# Altium PCB Pre_Amplifier.PcbDoc
Units mm, origin at the board's own origin, x right, y up, seen from the top; angles counter-clockwise.
Board outline 100.71 x 100.2 mm, 4 copper layers (Top Layer, Layer 1, Layer 2, Bottom Layer), stack 1.5 mm thick; 75 components, 57 nets, 183 pads, 4 vias.
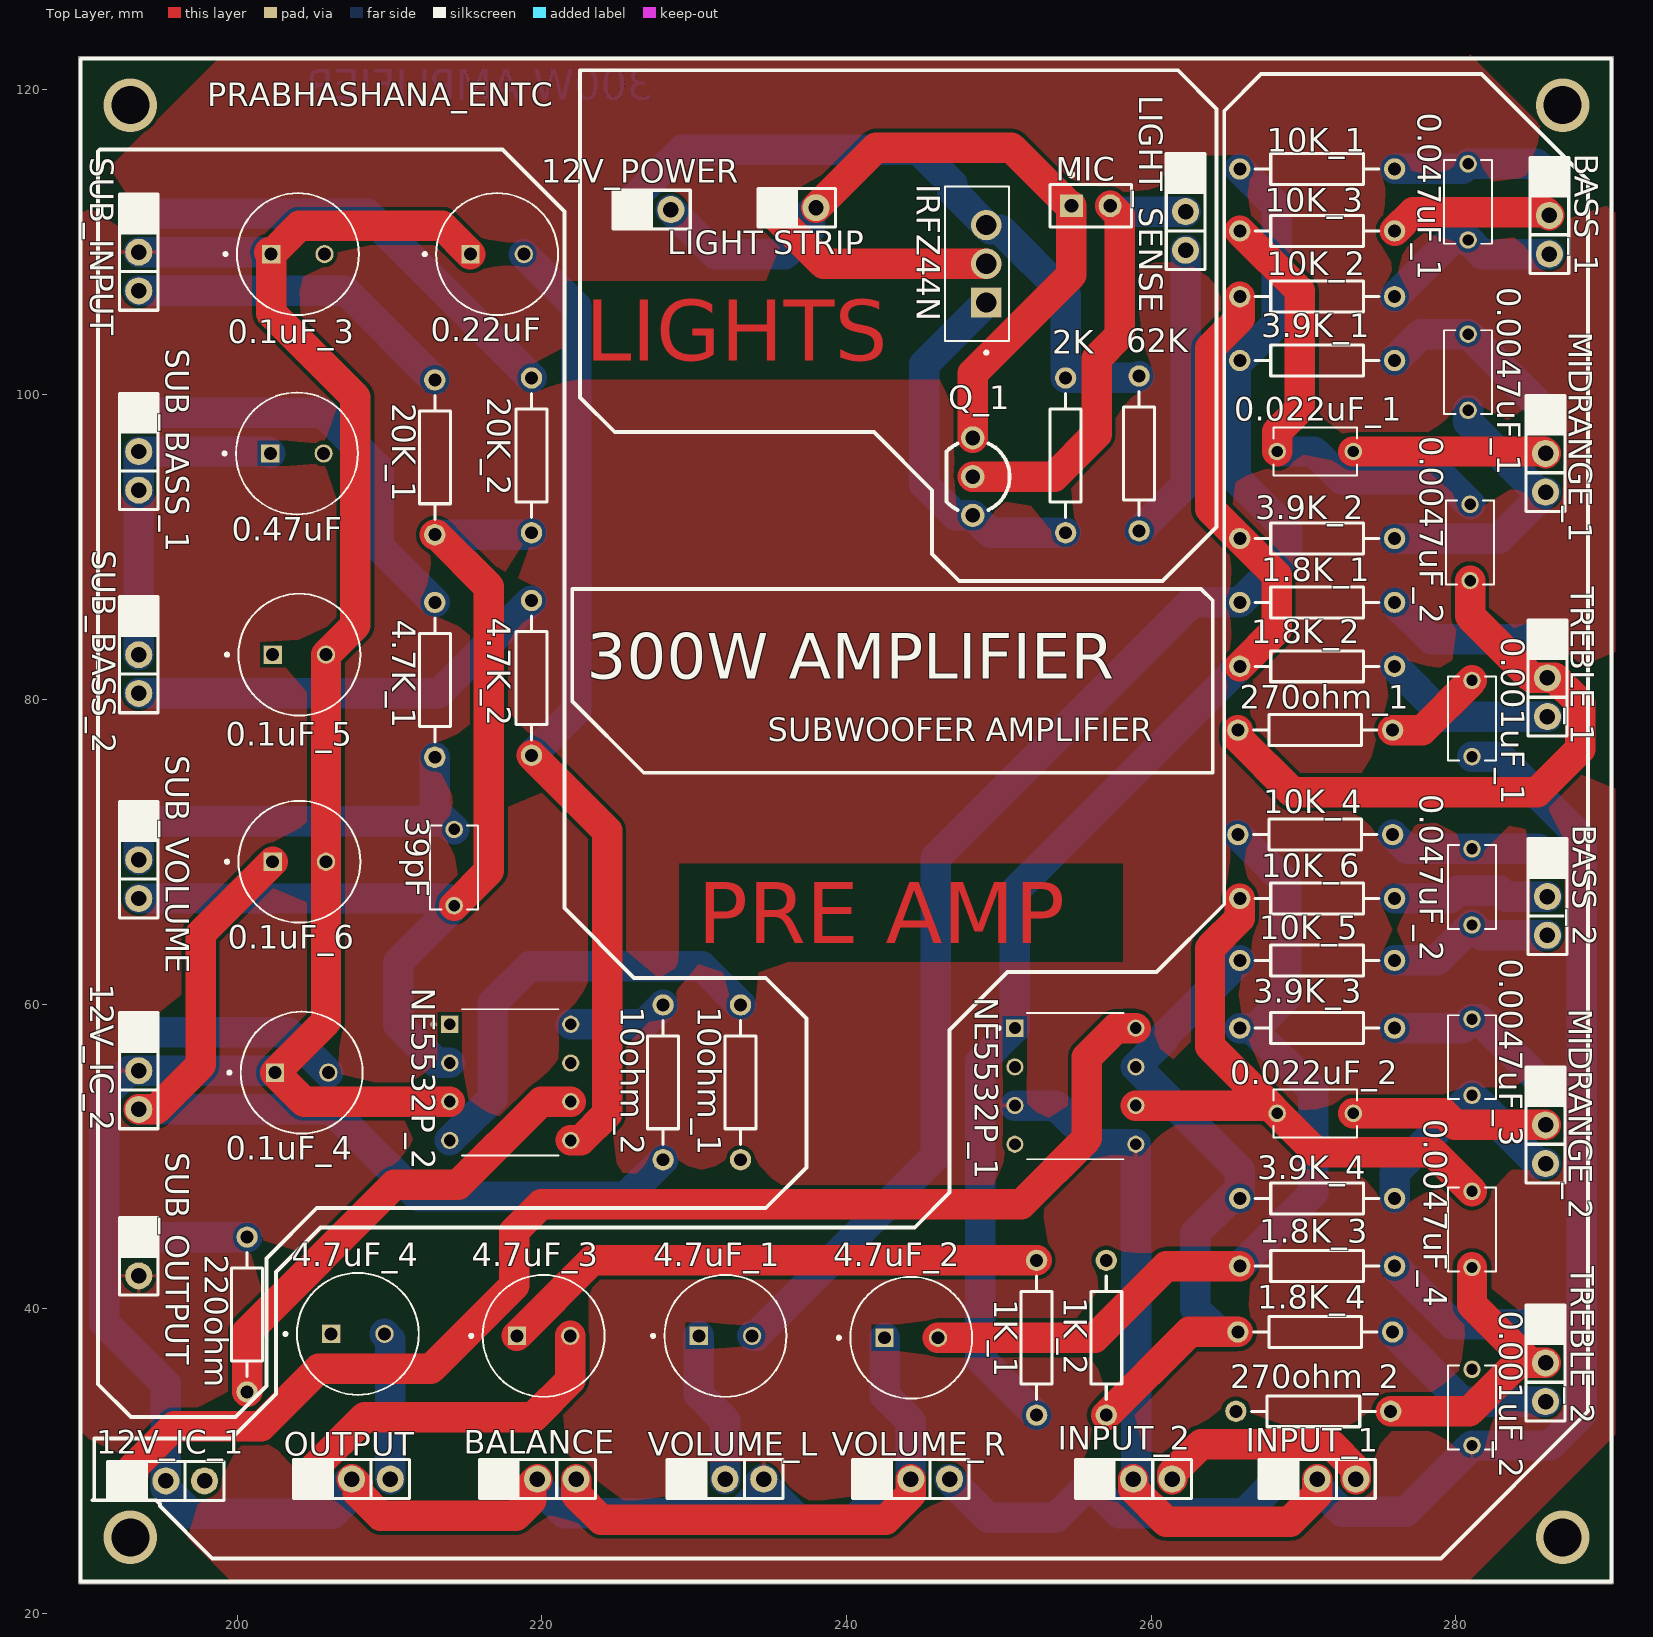
[diagram p0: Top Layer view]
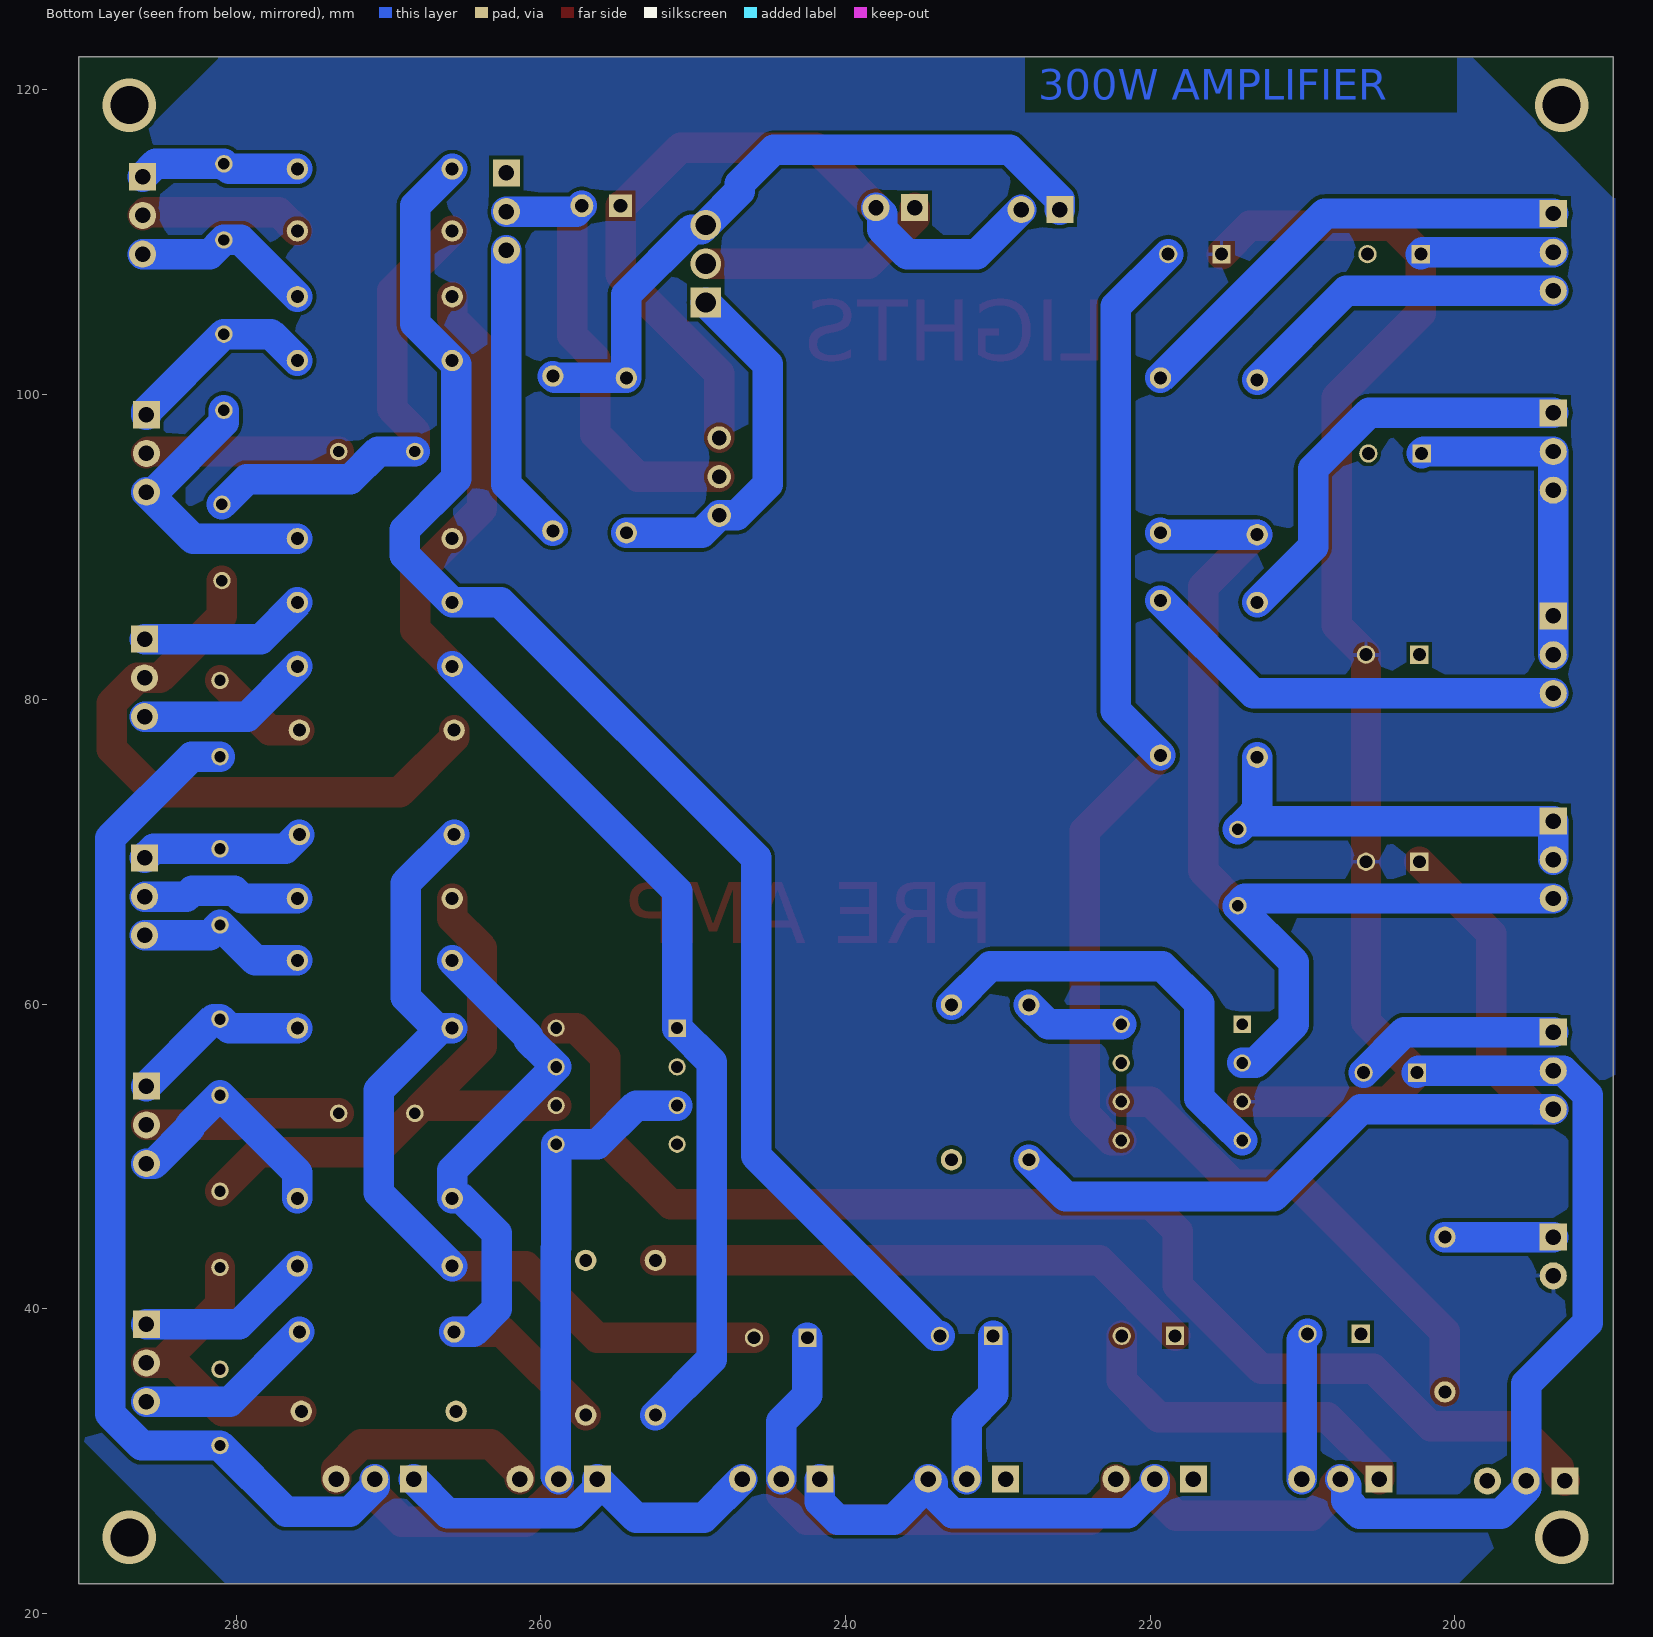
[diagram p1: Bottom Layer view, seen from below]
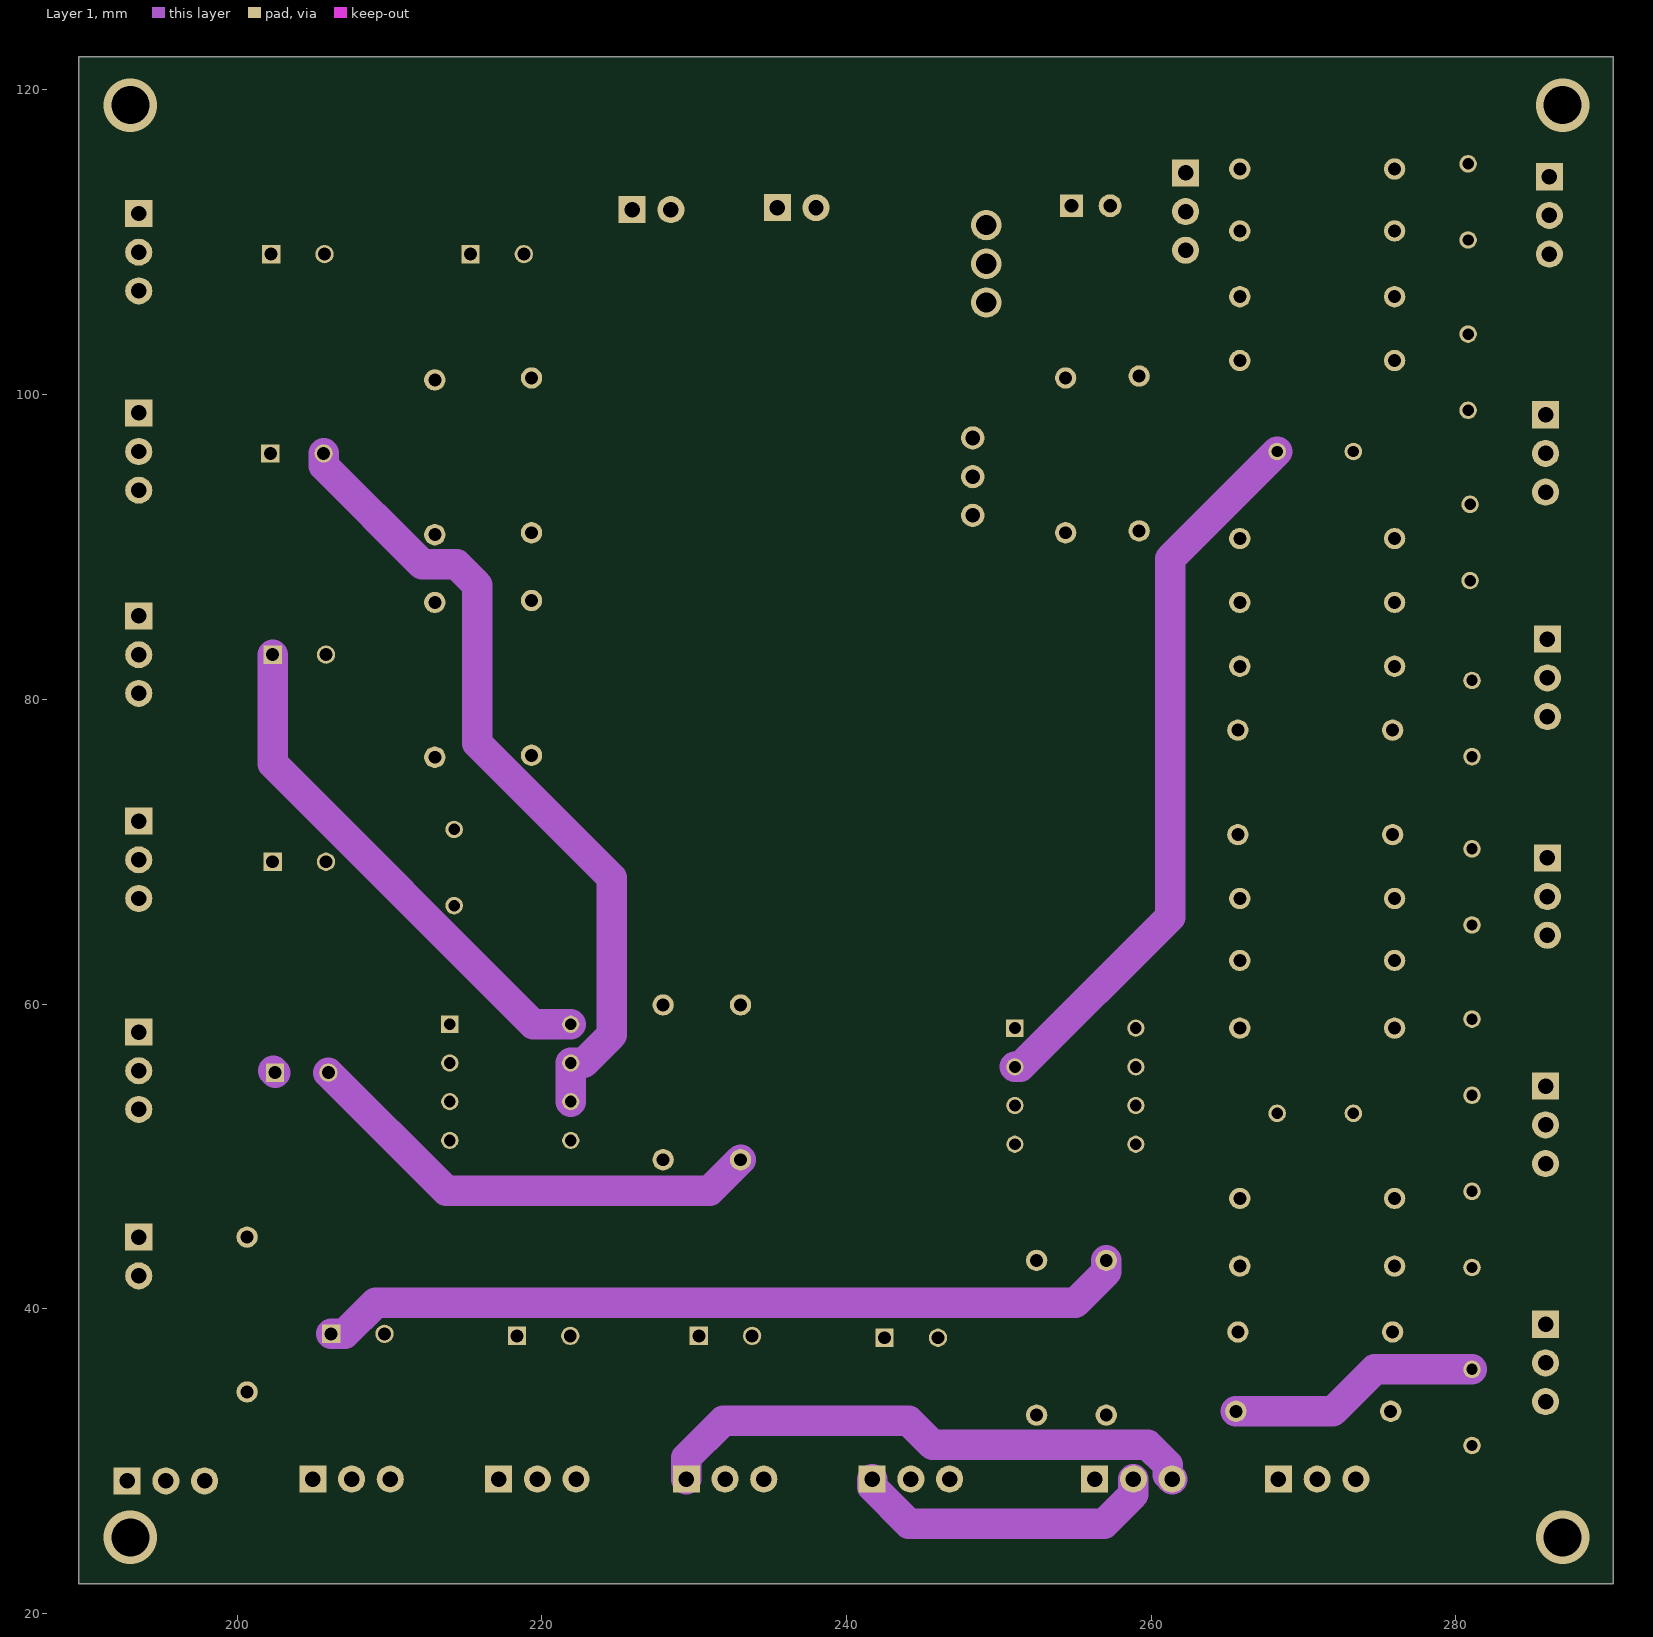
[diagram p2: Layer 1]
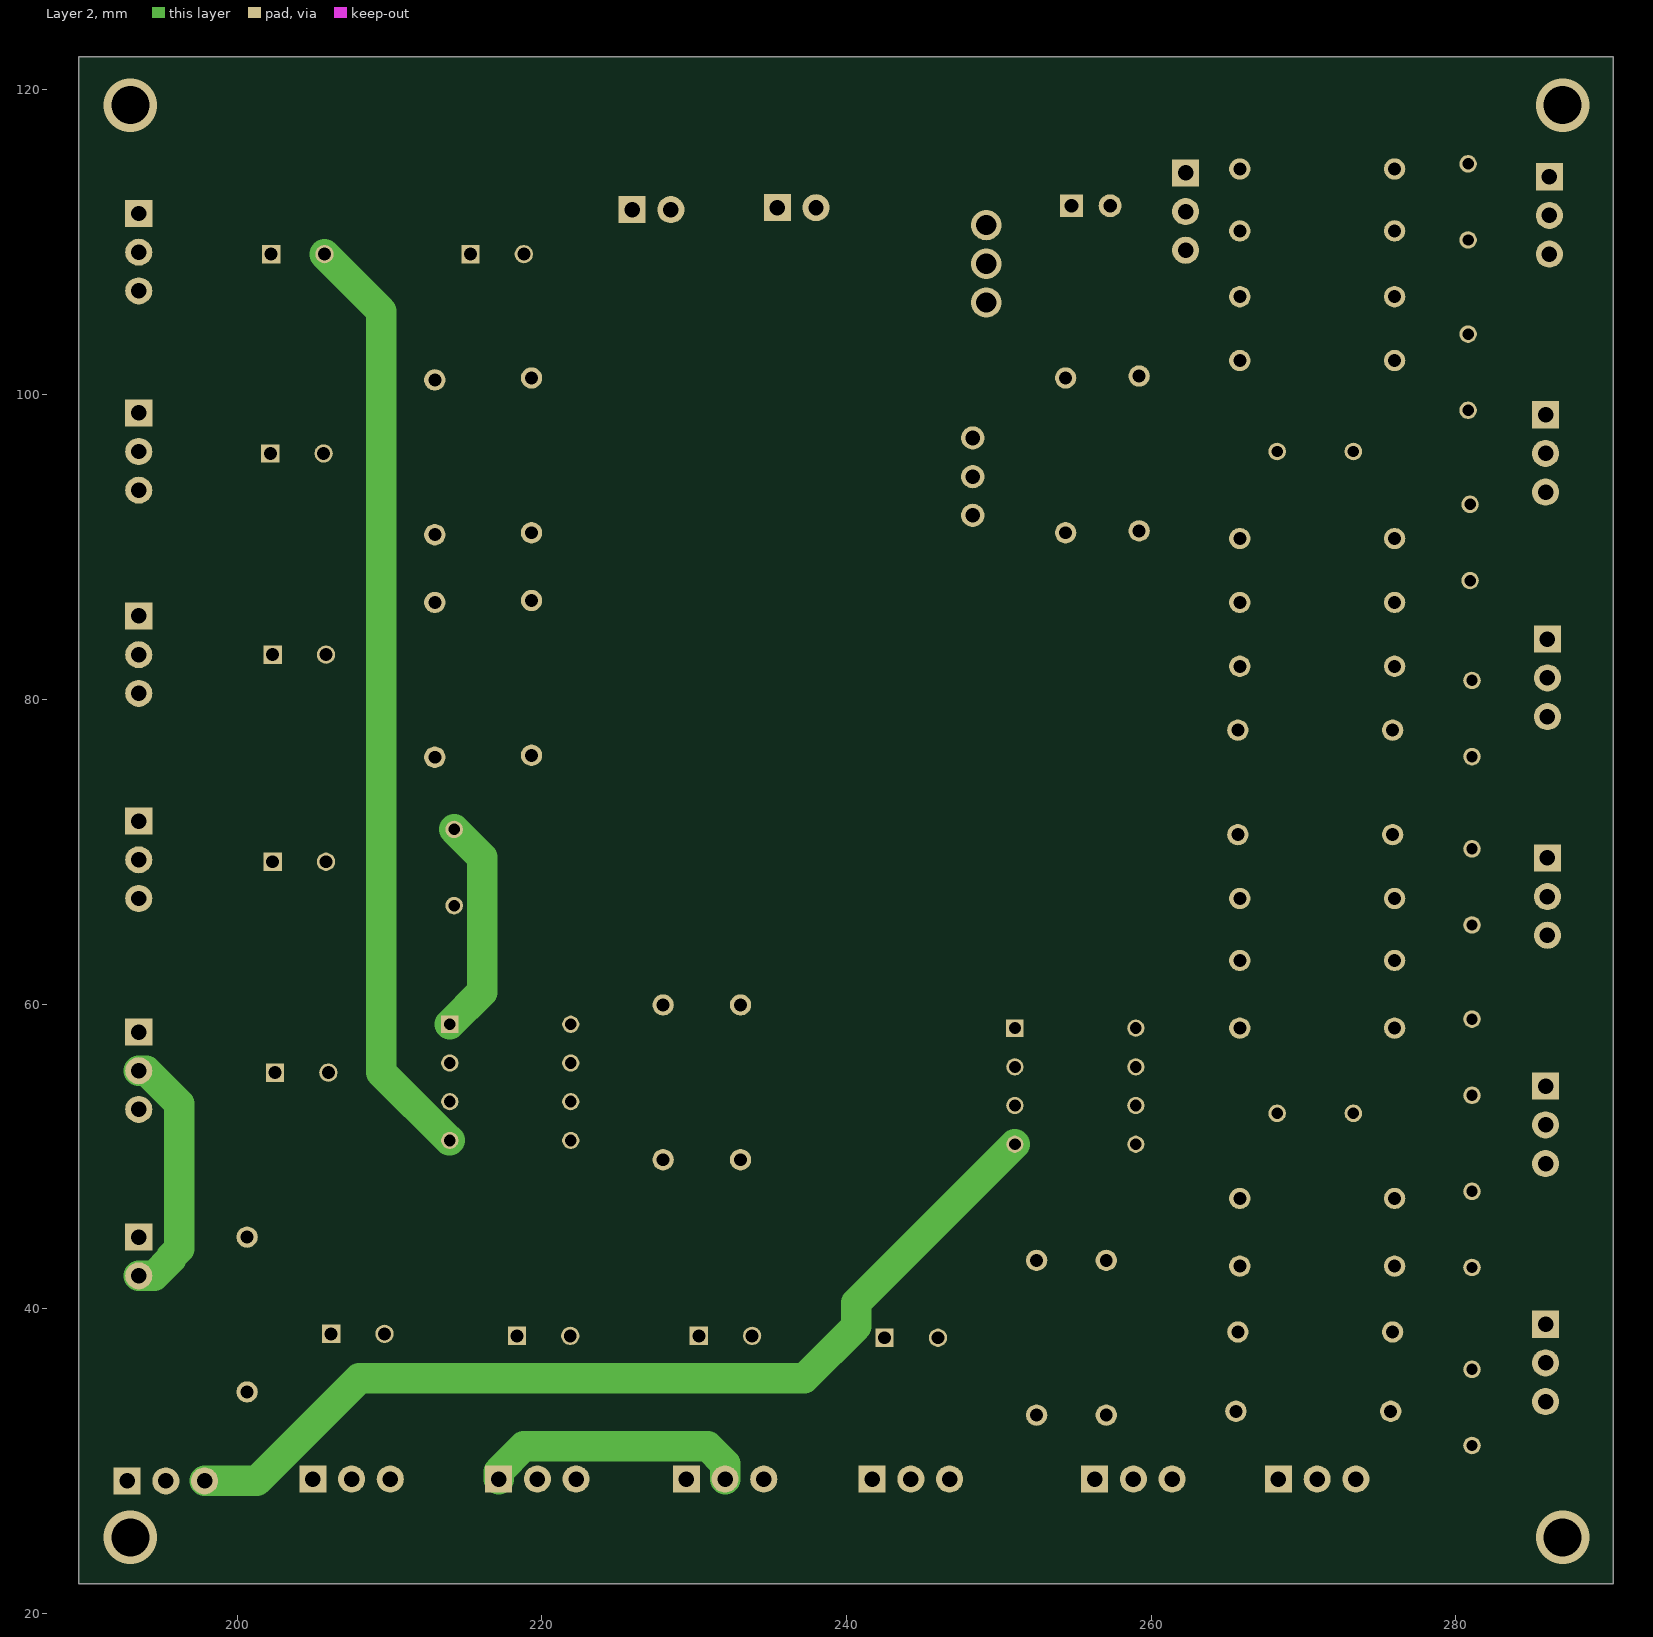
[diagram p3: Layer 2]

## Layer stack, top to bottom
Top Solder: solder mask 0.05, Solder Resist, Dk 3.5
Top Layer: signal copper 0.1
Dielectric 2: prepreg 0.2, PP-006, Dk 4.1
Layer 1: signal copper 0.2
Dielectric 1: dielectric 0.5, FR-4, Dk 4.8
Layer 2: signal copper 0.2
Dielectric 3: prepreg 0.2, PP-006, Dk 4.1
Bottom Layer: signal copper 0.1
Bottom Solder: solder mask 0.05, Solder Resist, Dk 3.5

## Board outline
189.611,21.971 290.322,21.971 290.322,122.174 189.611,122.174

## Design rules (kind name [scope] priority, off if disabled: settings)
Clearance [All] p1: gap=0.254 ignorepadtopadclearanceinfootprint=FALSE except(0: Arc-Hole Track-Hole SMDPad-Hole THPad-Hole Via-Hole Fill-Hole Poly-Hole Region-Hole Text-Hole)
MinimumSolderMaskSliver [All] p1: minsoldermaskwidth=0
PolygonConnect [All] p1: connectstyle=Relief reliefconductorwidth=0.254 reliefentries=4 polygonreliefangle="90 Angle" airgapwidth=0.254
RoutingVias [All] p1: holewidth=1 width=1.5 viastyle="Through Hole" minholewidth=0.5 minwidth=0.75 maxholewidth=2 maxwidth=2.5
SilkToSilkClearance [All] p1: silktosilkclearance=0
SilkToSolderMaskClearance [IsPad] p1: minsilkscreentomaskgap=0 clearancetoexposedcopper=TRUE
SolderMaskExpansion [All] p1: expansion=0.102 istentingtop=FALSE
Width [All] p1: maxlimit=2 minlimit=2 preferedwidth=2
27 further rules are at their usual default settings.

## Components (designator, comment, footprint, x,y, rotation, side; value= is the part's Value field where it differs from the comment)
0.001uF_1 "RDE5C1H273J2M1H03A" CAP_RDE5C1H273J2M1H03A 281.051,78.74 r90 top
0.001uF_2 "RDE5C1H273J2M1H03A" CAP_RDE5C1H273J2M1H03A 281.051,33.528 r90 top
0.1uF_3 "ECA1HM101" CAPPRD350W60D800H1150 203.99,109.22 r0 top
0.1uF_4 "ECA1HM101" CAPPRD350W60D800H1150 204.244,55.499 r0 top
0.1uF_5 "ECA1HM101" CAPPRD350W60D800H1150 204.089,82.931 r0 top
0.1uF_6 "ECA1HM101" CAPPRD350W60D800H1150 204.089,69.342 r0 top
0.22uF "ECA1HM101" CAPPRD350W60D800H1150 217.071,109.22 r0 top
0.022uF_1 "RDE5C1H273J2M1H03A" CAP_RDE5C1H273J2M1H03A 270.764,96.266 r180 top
0.022uF_2 "RDE5C1H273J2M1H03A" CAP_RDE5C1H273J2M1H03A 270.764,52.832 r180 top
0.47uF "ECA1HM101" CAPPRD350W60D800H1150 203.934,96.139 r0 top
0.0047uF_1 "RDE5C1H273J2M1H03A" CAP_RDE5C1H273J2M1H03A 280.797,101.473 r270 top
0.047uF_1 "RDE5C1H273J2M1H03A" CAP_RDE5C1H273J2M1H03A 280.797,112.649 r270 top
0.047uF_2 "RDE5C1H273J2M1H03A" CAP_RDE5C1H273J2M1H03A 281.051,67.691 r270 top
0.0047uF_2 "RDE5C1H273J2M1H03A" CAP_RDE5C1H273J2M1H03A 280.924,90.297 r90 top
0.0047uF_3 "RDE5C1H273J2M1H03A" CAP_RDE5C1H273J2M1H03A 281.051,56.515 r270 top
0.0047uF_4 "RDE5C1H273J2M1H03A" CAP_RDE5C1H273J2M1H03A 281.051,45.212 r90 top
1.8K_1 "Res2" AXIAL-0.4 270.891,86.36 r0 top value=1.8K
1.8K_2 "Res2" AXIAL-0.4 270.891,82.169 r180 top value=1.8K
1.8K_3 "Res2" AXIAL-0.4 270.891,42.799 r0 top value=1.8K
1.8K_4 "Res2" AXIAL-0.4 270.764,38.481 r180 top value=1.8K
1K_1 "Res2" AXIAL-0.4 252.476,38.1 r90 top value=1K
1K_2 "Res2" AXIAL-0.4 257.048,38.1 r90 top value=1K
2K "Res2" AXIAL-0.4 254.381,96.012 r90 top value=2K
3.9K_1 "Res2" AXIAL-0.4 270.891,102.235 r0 top value=3.9K
3.9K_2 "Res2" AXIAL-0.4 270.891,90.551 r180 top value=3.9K
3.9K_3 "Res2" AXIAL-0.4 270.891,58.42 r0 top value=3.9K
3.9K_4 "Res2" AXIAL-0.4 270.891,47.244 r180 top value=3.9K
4.7K_1 "Res2" AXIAL-0.4 212.979,81.28 r90 top value=4.7K
4.7K_2 "Res2" AXIAL-0.4 219.329,81.407 r90 top value=4.7K
4.7uF_1 "ECA1HM101" CAPPRD350W60D800H1150 232.057,38.227 r0 top
4.7uF_2 "ECA1HM101" CAPPRD350W60D800H1150 244.249,38.1 r0 top
4.7uF_3 "ECA1HM101" CAPPRD350W60D800H1150 220.119,38.227 r0 top
4.7uF_4 "ECA1HM101" CAPPRD350W60D800H1150 207.927,38.354 r0 top
10K_1 "Res2" AXIAL-0.4 270.891,114.808 r0 top value=10K
10K_2 "Res2" AXIAL-0.4 270.891,106.426 r180 top value=10K
10K_3 "Res2" AXIAL-0.4 270.891,110.744 r180 top value=10K
10K_4 "Res2" AXIAL-0.4 270.764,71.12 r0 top value=10K
10K_5 "Res2" AXIAL-0.4 270.891,62.865 r180 top value=10K
10K_6 "Res2" AXIAL-0.4 270.891,66.929 r180 top value=10K
10ohm_1 "Res2" AXIAL-0.4 233.045,54.864 r90 top value=10ohm
10ohm_2 "Res2" AXIAL-0.4 227.965,54.864 r90 top value=10ohm
12V_IC_1 "HEADER-1X3" HEADER-1X3 192.786,28.702 r90 top
12V_IC_2 "HEADER-1X3" HEADER-1X3 193.548,58.166 r0 top
12V_POWER "HEADER-1X2" HEADER-1X2 225.933,112.141 r90 top
20K_1 "Res2" AXIAL-0.4 212.979,95.885 r270 top value=20K
20K_2 "Res2" AXIAL-0.4 219.329,96.012 r270 top value=20K
39pF "RDE5C1H273J2M1H03A" CAP_RDE5C1H273J2M1H03A 214.249,68.961 r90 top
62K "Res2" AXIAL-0.4 259.207,96.139 r90 top value=62K
220ohm "Res2" AXIAL-0.4 200.66,39.624 r90 top value=220ohm
270ohm_1 "Res2" AXIAL-0.4 270.764,77.978 r180 top value=270ohm
270ohm_2 "Res2" AXIAL-0.4 270.637,33.274 r0 top value=270ohm
BALANCE "HEADER-1X3" HEADER-1X3 217.17,28.829 r90 top
BASS_1 "HEADER-1X3" HEADER-1X3 286.131,114.3 r0 top
BASS_2 "HEADER-1X3" HEADER-1X3 286.004,69.596 r0 top
INPUT_1 "HEADER-1X3" HEADER-1X3 268.351,28.829 r90 top
INPUT_2 "HEADER-1X3" HEADER-1X3 256.286,28.829 r90 top
IRFZ44N "IRFZ44NPBF" TO254P1016X419X2286-3 249.174,108.585 r90 top
"LIGHT STRIP" "HEADER-1X2" HEADER-1X2 235.458,112.268 r90 top
LIGHT_SENSE "HEADER-1X3" HEADER-1X3 262.255,114.554 r0 top
MIC "Mic2" PIN2 254.762,112.395 r0 top
MIDRANGE_1 "HEADER-1X3" HEADER-1X3 285.877,98.679 r0 top
MIDRANGE_2 "HEADER-1X3" HEADER-1X3 285.877,54.61 r0 top
NE5532P_1 "NE5532P" DIP794W45P254L959H508Q8 255.016,54.61 r0 top
NE5532P_2 "NE5532P" DIP794W45P254L959H508Q8 217.932,54.864 r0 top
OUTPUT "HEADER-1X3" HEADER-1X3 204.978,28.829 r90 top
Q_1 "BC557" TO-92 248.285,94.615 r0 top value={Value}
SUB_BASS_1 "HEADER-1X3" HEADER-1X3 193.548,98.806 r0 top
SUB_BASS_2 "HEADER-1X3" HEADER-1X3 193.548,85.471 r0 top
SUB_INPUT "HEADER-1X3" HEADER-1X3 193.548,111.887 r0 top
SUB_OUTPUT "HEADER-1X2" HEADER-1X2 193.548,44.704 r0 top
SUB_VOLUME "HEADER-1X3" HEADER-1X3 193.548,72.009 r0 top
TREBLE_1 "HEADER-1X3" HEADER-1X3 286.004,83.947 r0 top
TREBLE_2 "HEADER-1X3" HEADER-1X3 285.877,38.989 r0 top
VOLUME_L "HEADER-1X3" HEADER-1X3 229.489,28.829 r90 top
VOLUME_R "HEADER-1X3" HEADER-1X3 241.681,28.829 r90 top

## Footprints (in the part's own frame and the unit in brackets; to place one, negate y for a bottom-side part, rotate by r counter-clockwise, add the part's x,y. Pads: shape width x height; smd on the part's side, far side on the other; paste and mask are expansions set on the pad)
AXIAL-0.4 [mm] "Axial Device, Thru-Hole; 2 Leads; 0.4 in Pin Spacing"
  round 1.4 hole 0.85: 1(-5.08,0) 2(5.08,0)
  silkscreen extent -4.06,-1.02 4.06,1.02
CAP_RDE5C1H273J2M1H03A [mm]
  round 1.15 hole 0.75: 1(-2.5,0) 2(2.5,0)
  silkscreen extent -2.75,-1.58 2.75,1.58
CAPPRD350W60D800H1150 [mm]
  round 1.2 hole 0.85: N(1.75,0)
  rect 1.2x1.2 hole 0.85: P(-1.75,0)
  silkscreen extent -4.85,-4 4,4, body extent -4,-4 4,4, height 11.5
DIP794W45P254L959H508Q8 [mm]
  rect 1.13x1.13 hole 0.78: 1(-3.97,3.81)
  round 1.13 hole 0.78: 2(-3.97,1.27) 3(-3.97,-1.27) 4(-3.97,-3.81) 5(3.97,-3.81) 6(3.97,-1.27) 7(3.97,1.27) 8(3.97,3.81)
  silkscreen extent -5.13,-4.79 3.17,4.79
HEADER-1X2 [mil]
  rect 70x70 hole 40: 1(0,0)
  round 70 hole 40: 2(0,-100)
  silkscreen extent -50,-150 50,50, body extent -50,-150 50,50, height 470
HEADER-1X3 [mil]
  rect 70x70 hole 40: 1(0,0)
  round 70 hole 40: 2(0,-100) 3(0,-200)
  silkscreen extent -50,-250 50,50, body extent -50,-250 50,50, height 470
PIN2 [mm] "Photosensitive Diode; 2 Leads"
  rect 1.5x1.5 hole 0.9: 1(0,0)
  round 1.5 hole 0.9: 2(2.54,0)
  silkscreen extent -1.4,-1.4 3.94,2.17
TO254P1016X419X2286-3 [mm]
  rect 1.995x1.995 / inner round 1.995 / far side rect 1.995x1.995 hole 1.33: 1(-2.54,0)
  round 1.995 hole 1.33: 2(0,0) 3(2.54,0)
  silkscreen extent -5.93,-1.48 5.08,2.72, body extent -5.08,-1.47 5.08,2.72, height 22.86
TO-92 [mil]
  round 60 hole 38: 1(0,100) 2(0,0) 3(0,-100)
  silkscreen extent -68,-86 95,86, body extent -63,-110 93,110, height 217

## Part data
0.001uF_1 0.001uF_2 0.022uF_1 0.022uF_2 0.0047uF_1 0.047uF_1 0.047uF_2 0.0047uF_2 0.0047uF_3 0.0047uF_4 39pF: "Lead Capacitor C0G_EIA_ with Capacitance: 27000pF and Rated Voltage: 50Vdc", Package=NONSTANDARD, Availability=Unavailable, MF=Murata, MP=RDE5C1H273J2M1H03A, Price=None, SnapEDA_Link=https://www.snapeda.com/parts/RDE5C1H273J2M1H03A/Murata/view-part/4544923/?ref=snap
0.1uF_3 0.1uF_4 0.1uF_5 0.1uF_6 0.22uF 0.47uF 4.7uF_1 4.7uF_2 4.7uF_3 4.7uF_4: "100ÂµF 50V Aluminum Electrolytic Capacitors Radial, Can 2000 Hrs @ 85Â°C", Package="RADIAL-2 Panasonic", Availability="No availability data", Check_prices=https://www.snapeda.com/parts/ECA1HM101/Panasonic/view-part/4478734/?ref=eda, MF=Panasonic, MP=ECA1HM101, Price=None, SnapEDA_Link=https://www.snapeda.com/parts/ECA1HM101/Panasonic/view-part/4478734/?ref=snap
1.8K_1 1.8K_2 1.8K_3 1.8K_4 1K_1 1K_2 2K 3.9K_1 3.9K_2 3.9K_3 3.9K_4 4.7K_1 4.7K_2 10K_1 10K_2 10K_3 10K_4 10K_5 10K_6 10ohm_1 10ohm_2 20K_1 20K_2 62K 220ohm 270ohm_1 270ohm_2: "Resistor", LatestRevisionDate=17-Jul-2002, LatestRevisionNote="Re-released for DXP Platform.", PackageDescription="Axial Device, Thru-Hole; 2 Leads; 0.4 in Pin Spacing", PackageReference=AXIAL-0.4, Published=8-Jun-2000, Publisher="Altium Limited"
12V_IC_1 12V_IC_2 12V_POWER BALANCE BASS_1 BASS_2 INPUT_1 INPUT_2 "LIGHT STRIP" LIGHT_SENSE MIDRANGE_1 MIDRANGE_2 OUTPUT SUB_BASS_1 SUB_BASS_2 SUB_INPUT SUB_OUTPUT SUB_VOLUME TREBLE_1 TREBLE_2 VOLUME_L VOLUME_R: Supplier Part Number 1=S1011E-36-ND, Supplier 1=Digi-Key
  12V_POWER "LIGHT STRIP" SUB_OUTPUT: REEL=TH
IRFZ44N: "N-Channel 55 V 49A (Tc) 94W (Tc) Through Hole TO-220AB", Package="TO-220-3 Infineon", Check_prices=https://www.snapeda.com/parts/IRFZ44NPBF/Infineon+Technologies/view-part/?ref=eda, Digi-Key_Part_Number=IRFZ44NPBF-ND, MF=Infineon, MP=IRFZ44NPBF, Purchase-URL=https://pricing.snapeda.com/search/part/IRFZ44NPBF/?ref=eda, SnapEDA_Link=https://www.snapeda.com/parts/IRFZ44NPBF/Infineon+Technologies/view-part/?ref=snap
MIC: "Microphone", LatestRevisionDate=17-Jul-2002, LatestRevisionNote="Re-released for DXP Platform.", PackageReference=PIN2, Published=24-Mar-1999, Publisher="Altium Limited"
NE5532P_1 NE5532P_2: "Dual Low-Noise High-Speed Audio Operational Amplifier 8-PDIP 0 to 70", Package="PDIP-8 Texas", Availability=Good, Check_prices=https://www.snapeda.com/parts/NE5532P/Texas%20Instruments/view-part/9039/?ref=eda, MF="Texas Instruments", MP=NE5532P, Price=None, Purchase-URL=https://pricing.snapeda.com/search/part/NE5532P/?ref=eda, SnapEDA_Link=https://www.snapeda.com/parts/NE5532P/Texas%20Instruments/view-part/9039/?ref=snap

## Via types
v1: diameter 3.5, hole 2.5, Top Layer to Bottom Layer, 4 vias

## Nets (pads, with @x,y where several pads share a name; then routed paths per layer and width w, separated by ;. In a path a pad name is that pad's centre, name@x,y a point inside that pad or via, vN(x,y) a via of type N, cw(c..) or ccw(c..) an arc to the next point about the centre after c; other vN are vias at no path point)
GND: 0.001uF_1.1 0.001uF_2.1 0.1uF_3.P 0.1uF_4.P 0.1uF_5.N 0.1uF_6.N 0.22uF.P 12V_IC_1.2 12V_IC_2.2 BALANCE.2 INPUT_1.2 INPUT_2.2 NE5532P_1.3 NE5532P_1.5 NE5532P_2.3 OUTPUT.2 SUB_INPUT.2 SUB_OUTPUT.2 VOLUME_L.3 VOLUME_R.1 | length 342.7
  Top Layer w2: 0.1uF_3.P@202.113,109.347 0.1uF_3.P ; OUTPUT.2 207.915,28.432 207.915,27.941 209.44,26.416 218.308,26.416 219.313,27.421 219.313,28.432 BALANCE.2 ; NE5532P_2.3 204.399,53.594 0.1uF_4.P 205.839,58.844 0.1uF_6.N 0.1uF_5.N 207.772,84.864 207.772,99.822 202.24,105.354 0.1uF_3.P ; 0.22uF.P 213.467,111.074 204.094,111.074 0.1uF_3.P ; INPUT_2.2 258.826,28.181 260.972,26.035 269.113,26.035 270.891,27.813 INPUT_1.2
  Layer 1 w2: 0.1uF_4.P@202.367,55.626 0.1uF_4.P ; VOLUME_R.1 241.681,28.321 244.094,25.908 256.916,25.908 258.826,27.818 INPUT_2.2
  Layer 2 w2: SUB_OUTPUT.2 194.559,42.164 195.691,43.296 195.691,43.418 196.215,43.942 196.215,53.45 194.039,55.626 12V_IC_2.2
  Bottom Layer w2: SUB_INPUT.2 202.113,109.347 0.1uF_3.P ; 0.1uF_4.P 202.367,55.626 12V_IC_2.2 192.9,55.626 191.294,54.02 191.294,39.1 195.326,35.068 12V_IC_1.2 195.326,28.211 196.978,26.559 206.259,26.559 207.121,27.421 207.121,28.432 OUTPUT.2 ; BALANCE.2 219.71,28.338 221.473,26.575 232.963,26.575 234.283,27.895 234.283,28.543 VOLUME_L.3 234.569,28.448 236.855,26.162 240.509,26.162 241.681,27.334 VOLUME_R.1 ; NE5532P_1.3 253.746,53.34 256.286,50.8 NE5532P_1.5 258.986,44.005 259.002,43.989 259.002,29.005 INPUT_2.2 ; INPUT_1.2 270.891,28.338 272.543,26.686 276.709,26.686 0.001uF_2.1 286.184,31.028 288.258,33.102 288.258,70.893 282.911,76.24 0.001uF_1.1
Net0.001uF_1_2: 0.001uF_1.2 270ohm_1.1 | length 6.6
  Top Layer w2: 270ohm_1.1 277.789,77.978 0.001uF_1.2
Net0.001uF_2_2: 0.001uF_2.2 270ohm_2.1 | length 16.6
  Layer 1 w2: 270ohm_2.1 271.927,33.274 274.681,36.028 0.001uF_2.2
Net0.1uF_3_N: 0.1uF_3.N 10ohm_1.2 NE5532P_2.4 | length 90.1
  Layer 2 w2: 0.1uF_3.N 209.474,105.486 209.474,55.509 213.93,51.054 NE5532P_2.4
  Bottom Layer w2: NE5532P_2.4 214.683,51.775 214.715,51.775 216.768,53.828 216.768,60.05 219.202,62.484 230.505,62.484 10ohm_1.2
Net0.1uF_4_N: 0.1uF_4.N 10ohm_1.1 12V_IC_2.1 | length 44.7
  Layer 1 w2: 0.1uF_4.N 213.741,47.752 231.013,47.752 10ohm_1.1
  Bottom Layer w2: 12V_IC_2.1 203.327,58.166 0.1uF_4.N
Net0.1uF_5_P: 0.1uF_5.P 10ohm_2.2 NE5532P_2.8 | length 40.4
  Layer 1 w2: 0.1uF_5.P 202.339,75.784 219.449,58.674 NE5532P_2.8
  Bottom Layer w2: NE5532P_2.8 226.695,58.674 10ohm_2.2
Net0.1uF_6_P: 0.1uF_6.P 10ohm_2.1 12V_IC_2.3 | length 58.4
  Top Layer w2: 12V_IC_2.3 194.691,53.086 197.612,56.007 197.612,64.615 0.1uF_6.P
  Bottom Layer w2: 12V_IC_2.3 206.176,53.086 211.891,47.371 225.552,47.371 10ohm_2.1
Net0.022uF_1_1: 0.022uF_1.1 MIDRANGE_1.2 | length 12.7
  Top Layer w2: 0.022uF_1.1 285.75,96.266 MIDRANGE_1.2
Net0.022uF_1_2: 0.022uF_1.2 0.0047uF_2.2 10K_3.2 NE5532P_1.2 | length 78.6
  Top Layer w2: 10K_3.2 269.748,106.807 269.748,99.06 268.264,97.576 0.022uF_1.2
  Layer 1 w2: NE5532P_1.2 251.409,55.88 261.239,65.71 261.239,89.241 0.022uF_1.2
  Bottom Layer w2: 0.022uF_1.2 270.677,96.266 272.506,94.437 279.284,94.437 0.0047uF_2.2
Net0.022uF_2_1: 0.022uF_2.1 MIDRANGE_2.2 | length 12.9
  Top Layer w2: 0.022uF_2.1 279.19,52.832 279.952,52.07 MIDRANGE_2.2
Net0.022uF_2_2: 0.022uF_2.2 0.0047uF_4.2 10K_6.2 NE5532P_1.6 | length 40.4
  Top Layer w2: NE5532P_1.6 267.756,53.34 ; 10K_6.2 265.811,65.628 263.857,63.674 263.857,57.239 267.756,53.34 ; 0.0047uF_4.2 278.491,50.272 270.824,50.272 0.022uF_2.2 267.756,53.34
Net0.22uF_N: 0.22uF.N 4.7K_2.1 NE5532P_2.5 | length 64.2
  Top Layer w2: 4.7K_2.1 224.282,71.374 224.282,52.786 222.55,51.054 NE5532P_2.5
  Bottom Layer w2: 0.22uF.N 222.25,105.791 222.25,79.248 4.7K_2.1
Net0.0047uF_1_1: 0.0047uF_1.1 3.9K_1.2 MIDRANGE_1.1 | length 12.9
  Bottom Layer w2: 3.9K_1.2 277.709,103.973 0.0047uF_1.1 285.877,98.893 MIDRANGE_1.1
Net0.047uF_1_1: 0.047uF_1.1 10K_1.2 BASS_1.1 | length 10.7
  Bottom Layer w2: 10K_1.2 280.456,114.808 0.047uF_1.1 285.282,115.149 BASS_1.1
Net0.0047uF_1_2: 0.0047uF_1.2 3.9K_2.1 MIDRANGE_1.3 | length 18.9
  Bottom Layer w2: 3.9K_2.1 275.979,90.543 282.821,90.543 MIDRANGE_1.3 285.386,93.599 280.797,98.188 0.0047uF_1.2
Net0.047uF_1_2: 0.047uF_1.2 10K_2.1 BASS_1.3 | length 12.1
  Bottom Layer w2: 10K_2.1 279.694,110.149 0.047uF_1.2 281.726,109.22 BASS_1.3
Net0.0047uF_2_1: 0.0047uF_2.1 270ohm_1.2 TREBLE_1.2 | length 40.5
  Top Layer w2: 270ohm_1.2 265.684,77.47 269.24,73.914 285.324,73.914 288.147,76.737 288.147,79.755 286.495,81.407 TREBLE_1.2 284.993,81.407 280.924,85.476 0.0047uF_2.1
Net0.047uF_2_1: 0.047uF_2.1 10K_4.2 BASS_2.1 | length 10.8
  Bottom Layer w2: 10K_4.2 276.773,70.191 0.047uF_2.1 285.409,70.191 BASS_2.1
Net0.047uF_2_2: 0.047uF_2.2 10K_5.1 BASS_2.3 | length 11.3
  Bottom Layer w2: 10K_5.1 278.725,62.865 0.047uF_2.2 281.726,64.516 BASS_2.3
Net0.0047uF_3_1: 0.0047uF_3.1 3.9K_3.2 MIDRANGE_2.1 | length 12
  Bottom Layer w2: 3.9K_3.2 280.456,58.42 0.0047uF_3.1 281.472,59.015 MIDRANGE_2.1
Net0.0047uF_3_2: 0.0047uF_3.2 3.9K_4.1 MIDRANGE_2.3 | length 15.6
  Bottom Layer w2: 3.9K_4.1 275.971,48.935 0.0047uF_3.2 283.02,52.046 283.02,51.896 285.386,49.53 MIDRANGE_2.3
Net0.0047uF_4_1: 0.0047uF_4.1 270ohm_2.2 TREBLE_2.2 | length 19.3
  Top Layer w2: 270ohm_2.2 280.884,33.274 284.059,36.449 284.866,36.449 ; 0.0047uF_4.1 281.051,40.264 284.866,36.449 ; TREBLE_2.2 284.866,36.449
Net0.47uF_N: 0.47uF.N 220ohm.1 NE5532P_2.6 NE5532P_2.7 | length 84.8
  Top Layer w2: 220ohm.1 200.66,38.481 210.312,48.133 214.503,48.133 219.964,53.594 NE5532P_2.6
  Layer 1 w2: 0.47uF.N 205.684,95.337 212.17,88.851 214.425,88.851 215.773,87.503 215.773,77.12 224.597,68.296 224.597,57.973 222.758,56.134 NE5532P_2.7 NE5532P_2.6
Net0.47uF_P: 0.47uF.P SUB_BASS_1.2 SUB_BASS_1.3 SUB_BASS_2.1 SUB_BASS_2.2 | length 22
  Bottom Layer w2: SUB_BASS_2.2 SUB_BASS_2.1 SUB_BASS_1.3 SUB_BASS_1.2 202.057,96.266 0.47uF.P
Net1.8K_1_1: 1.8K_1.1 3.9K_1.1 4.7uF_1.N 10K_1.1 | length 96.6
  Bottom Layer w2: 4.7uF_1.N 234.061,38.227 245.872,50.038 245.872,69.596 262.636,86.36 1.8K_1.1 268.92,89.469 268.92,91.125 265.557,94.488 265.557,101.981 3.9K_1.1 268.224,104.648 268.224,112.395 10K_1.1
Net1.8K_1_2: 1.8K_1.2 TREBLE_1.1 | length 11
  Bottom Layer w2: 1.8K_1.2 278.384,83.947 TREBLE_1.1
Net1.8K_2_1: 1.8K_2.1 TREBLE_1.3 | length 11.4
  Bottom Layer w2: 1.8K_2.1 279.273,78.867 TREBLE_1.3
Net1.8K_2_2: 1.8K_2.2 1K_1.1 3.9K_2.2 10K_2.2 NE5532P_1.1 | length 85.6
  Top Layer w2: 1.8K_2.2 268.224,84.582 268.224,88.138 3.9K_2.2 263.857,92.505 263.857,103.044 265.811,104.998 10K_2.2
  Bottom Layer w2: 1K_1.1 248.792,36.704 248.792,56.198 251.014,58.42 NE5532P_1.1 251.046,67.404 1.8K_2.2
Net1.8K_3_1: 1.8K_3.1 3.9K_3.1 4.7uF_2.N 10K_4.1 | length 56.9
  Top Layer w2: 4.7uF_2.N 256.286,38.1 260.985,42.799 1.8K_3.1
  Bottom Layer w2: 10K_4.1 268.859,67.945 268.859,60.452 266.827,58.42 266.573,58.42 ; 1.8K_3.1 270.637,47.625 270.637,54.356 266.573,58.42 ; 3.9K_3.1 266.573,58.42
Net1.8K_3_2: 1.8K_3.2 TREBLE_2.1 | length 11.5
  Bottom Layer w2: 1.8K_3.2 279.781,38.989 TREBLE_2.1
Net1.8K_4_1: 1.8K_4.1 TREBLE_2.3 | length 11.9
  Bottom Layer w2: 1.8K_4.1 280.416,33.909 TREBLE_2.3
Net1.8K_4_2: 1.8K_4.2 1K_2.1 3.9K_4.2 10K_5.2 NE5532P_1.7 | length 44.5
  Top Layer w2: 1K_2.1 262.509,38.481 1.8K_4.2
  Bottom Layer w2: 1.8K_4.2 264.414,38.481 262.89,40.005 262.89,44.958 265.176,47.244 3.9K_4.2 265.811,49.087 259.739,55.159 259.707,55.159 NE5532P_1.7 259.707,56.601 259.739,56.601 260.805,57.667 260.805,57.859 10K_5.2
Net1K_1_2: 1K_1.2 4.7uF_3.P | length 36.2
  Top Layer w2: 4.7uF_3.P 223.322,43.18 1K_1.2
Net1K_2_2: 1K_2.2 4.7uF_4.P | length 53.3
  Layer 1 w2: 4.7uF_4.P 207.055,38.354 209.087,40.386 255.016,40.386 257.048,42.418 1K_2.2
Net2K_1: 2K.1 IRFZ44N.1 Q_1.3 | length 24.2
  Bottom Layer w2: IRFZ44N.1 245.11,101.981 245.11,94.107 247.142,92.075 Q_1.3 249.428,90.932 2K.1
Net2K_2: 2K.2 12V_POWER.1 62K.2 IRFZ44N.3 | length 45
  Bottom Layer w2: 12V_POWER.1 225.933,112.789 229.222,116.078 244.7,116.078 246.937,113.841 246.937,113.362 IRFZ44N.3 249.462,110.837 250.107,110.837 254.381,106.562 2K.2 259.08,101.092 62K.2
Net4.7K_1_1: 4.7K_1.1 39pF.2 NE5532P_2.1 SUB_VOLUME.1 SUB_VOLUME.2 | length 42.4
  Layer 2 w2: NE5532P_2.1 216.078,60.79 216.078,69.632 39pF.2
  Bottom Layer w2: SUB_VOLUME.2 SUB_VOLUME.1 213.701,72.009 ; 4.7K_1.1 212.979,72.731 213.701,72.009 ; 39pF.2 213.701,72.009
Net4.7K_1_2: 4.7K_1.2 SUB_BASS_1.1 | length 27.6
  Bottom Layer w2: SUB_BASS_1.1 205.639,98.806 209.309,95.136 209.309,90.03 4.7K_1.2
Net4.7K_2_2: 4.7K_2.2 SUB_BASS_2.3 | length 28.3
  Bottom Layer w2: SUB_BASS_2.3 213.233,80.391 4.7K_2.2
Net4.7uF_1_P: 4.7uF_1.P BALANCE.1 VOLUME_L.2 | length 27.6
  Layer 2 w2: BALANCE.1 217.17,29.32 218.822,30.972 230.897,30.972 232.029,29.84 VOLUME_L.2
  Bottom Layer w2: 4.7uF_1.P 230.307,34.389 232.029,32.667 VOLUME_L.2
Net4.7uF_2_P: 4.7uF_2.P BALANCE.3 VOLUME_R.2 | length 35.4
  Top Layer w2: BALANCE.3 222.25,27.813 223.901,26.162 242.565,26.162 244.221,27.818 VOLUME_R.2
  Bottom Layer w2: 4.7uF_2.P 242.499,34.325 244.221,32.604 VOLUME_R.2
Net4.7uF_3_N: 4.7uF_3.N OUTPUT.1 | length 22.9
  Top Layer w2: OUTPUT.1 204.978,29.477 208.394,32.893 219.456,32.893 221.869,35.306 4.7uF_3.N
Net4.7uF_4_N: 4.7uF_4.N OUTPUT.3 | length 9.7
  Bottom Layer w2: 4.7uF_4.N 210.058,37.973 OUTPUT.3
Net10K_3_1: 10K_3.1 BASS_1.2 | length 10.8
  Top Layer w2: 10K_3.1 277.205,111.978 285.913,111.978 BASS_1.2
Net10K_6_1: 10K_6.1 BASS_2.2 | length 10.4
  Bottom Layer w2: 10K_6.1 279.601,66.929 280.117,67.445 282.866,67.445 283.255,67.056 BASS_2.2
Net12V_IC_1_1: 12V_IC_1.1 NE5532P_1.8 | length 84
  Top Layer w2: 12V_IC_1.1 193.183,29.099 193.183,29.59 195.883,32.29 201.594,32.29 205.372,36.068 212.725,36.068 218.186,41.529 218.186,45.085 219.964,46.863 251.46,46.863 255.778,51.181 255.778,56.515 257.683,58.42 NE5532P_1.8
Net12V_IC_1_3: 12V_IC_1.3 NE5532P_1.4 | length 63.2
  Layer 2 w2: 12V_IC_1.3 201.3,28.702 208.031,35.433 237.236,35.433 240.645,38.842 240.645,40.399 NE5532P_1.4
Net12V_POWER_2: 12V_POWER.2 "LIGHT STRIP.2" MIC.1 Q_1.1 | length 50.5
  Top Layer w2: 237.998,112.268 241.935,116.205 250.825,116.205 254.635,112.395 MIC.1 254.762,107.865 248.285,101.388 Q_1.1
  Bottom Layer w2: 12V_POWER.2 231.394,109.22 235.961,109.22 237.601,110.86 237.601,111.871 237.998,112.268
Net20K_1_1: 20K_1.1 SUB_INPUT.3 | length 21.9
  Bottom Layer w2: SUB_INPUT.3 207.137,106.807 20K_1.1
Net20K_1_2: 20K_1.2 20K_2.2 39pF.1 NE5532P_2.2 SUB_VOLUME.3 | length 67.9
  Top Layer w2: 20K_1.2 213.106,90.805 216.535,87.376 216.535,68.747 39pF.1
  Bottom Layer w2: SUB_VOLUME.3 213.781,66.929 39pF.1 214.249,66.421 210.566,62.738 210.566,58.674 213.106,56.134 NE5532P_2.2 ; 20K_1.2 219.202,90.805 20K_2.2
Net20K_2_1: 20K_2.1 SUB_INPUT.1 | length 30.3
  Bottom Layer w2: SUB_INPUT.1 208.534,111.887 20K_2.1
Net62K_1: 62K.1 LIGHT_SENSE.3 | length 19.7
  Bottom Layer w2: 62K.1 262.255,94.107 LIGHT_SENSE.3
Net220ohm_2: 220ohm.2 SUB_OUTPUT.1 | length 7.1
  Bottom Layer w2: SUB_OUTPUT.1 220ohm.2
NetINPUT_1_1: INPUT_1.1 INPUT_2.1 VOLUME_R.3 | length 25.9
  Bottom Layer w2: VOLUME_R.3 249.301,26.289 253.746,26.289 INPUT_2.1 256.286,28.181 257.892,26.575 266.097,26.575 INPUT_1.1
NetINPUT_1_3: INPUT_1.3 INPUT_2.3 VOLUME_L.1 | length 50.8
  Top Layer w2: INPUT_2.3 261.366,29.21 263.271,31.115 271.793,31.115 273.431,29.477 INPUT_1.3
  Layer 1 w2: VOLUME_L.1 229.489,30.226 231.902,32.639 244.093,32.639 245.666,31.066 257.857,31.066 257.874,31.083 259.76,31.083 261.08,29.763 261.08,29.115 INPUT_2.3
NetIRFZ44N_2: "LIGHT STRIP.1" IRFZ44N.2 | length 15.6
  Top Layer w2: 235.458,112.268 235.458,111.62 238.493,108.585 IRFZ44N.2
NetLIGHT_SENSE_2: LIGHT_SENSE.2 MIC.2 Q_1.2 | length 30.3
  Top Layer w2: Q_1.2 253.619,94.615 256.413,97.409 256.413,102.362 257.937,103.886 257.937,111.76 MIC.2
  Bottom Layer w2: MIC.2 257.683,112.014 LIGHT_SENSE.2
pads on no net: LIGHT_SENSE.1
copper on no net:
  other v1: 193,25 287,25 193,119 287,119

## Polygon pours and split planes (outlines as drawn)
GND on Bottom Layer "GND_L04_P002" (solid, remove dead copper, pour order 2): 189.611,112.903 198.882,122.174 281.178,122.174 281.178,122.047 290.322,112.903 290.322,31.623 280.67,21.971 199.771,21.971 189.484,32.258 189.484,112.903
GND on Top Layer "GND_L01_P003" (solid, remove dead copper, pour order 3): 189.484,112.776 198.755,122.047 198.755,122.174 280.797,122.174 280.924,122.301 290.322,112.903 290.449,112.903 290.449,31.75 280.67,21.971 199.771,21.971 189.611,32.131 189.611,112.776 189.484,112.903

## Other copper
Top Layer:
  text "LIGHTS" at 222.869,102.219 h4
  text "PRE AMP" at 230.235,63.992 h4
Bottom Layer:
  text "300W AMPLIFIER" at 227.365,119.345 h2

## Silkscreen, mask and mechanical layers (free items; w line width, h text height)
Top Overlay:
  lines w0.254: 189.738,22.098 189.738,122.047 290.195,122.047 290.195,22.098 189.738,22.098 ; 190.5,27.432 190.627,27.559 190.627,31.496 199.644,31.496 202.565,34.417 202.565,42.418 205.486,45.339 244.475,45.339 246.761,47.625 246.761,58.293 250.571,62.103 260.35,62.103 264.795,66.548 264.795,118.618 267.208,121.031 281.686,121.031 288.671,114.046 288.671,33.274 279.019,23.622 198.374,23.622 194.945,27.051 194.945,27.178 194.691,27.432 190.5,27.432 ; 190.881,35.052 190.881,115.951 191.008,116.078 217.424,116.078 221.488,112.014 221.488,66.294 226.06,61.722 234.696,61.722 237.363,59.055 237.363,49.276 234.696,46.609 205.232,46.609 201.93,43.307 201.93,34.925 199.898,32.893 193.04,32.893 190.881,35.052 ; 221.996,79.883 226.695,75.184 264.033,75.184 264.033,85.979 264.033,86.487 263.271,87.249 221.996,87.249 221.996,79.883 ; 222.504,99.822 224.79,97.536 241.808,97.536 245.618,93.726 245.618,89.535 247.396,87.757 260.731,87.757 264.287,91.313 264.287,118.745 261.747,121.285 222.504,121.285 222.504,99.822
  text "PRABHASHANA_ENTC" at 198.039,118.918 h1.52
  text "300W AMPLIFIER" at 222.95,81.345 h3
  text "SUBWOOFER AMPLIFIER" at 234.842,77.235 h1.52
Mechanical 1:
  lines w0.254: 189.738,22.098 189.738,122.047 290.195,122.047 290.195,22.098 189.738,22.098